# Altium PCB PCB_MB.PcbDoc
Units mm, origin at the board's own origin, x right, y up, seen from the top; angles counter-clockwise.
Board outline 150 x 150 mm, 2 copper layers (Top Layer, GND), stack 0.325 mm thick; 24 components, 29 nets, 193 pads, 0 vias.
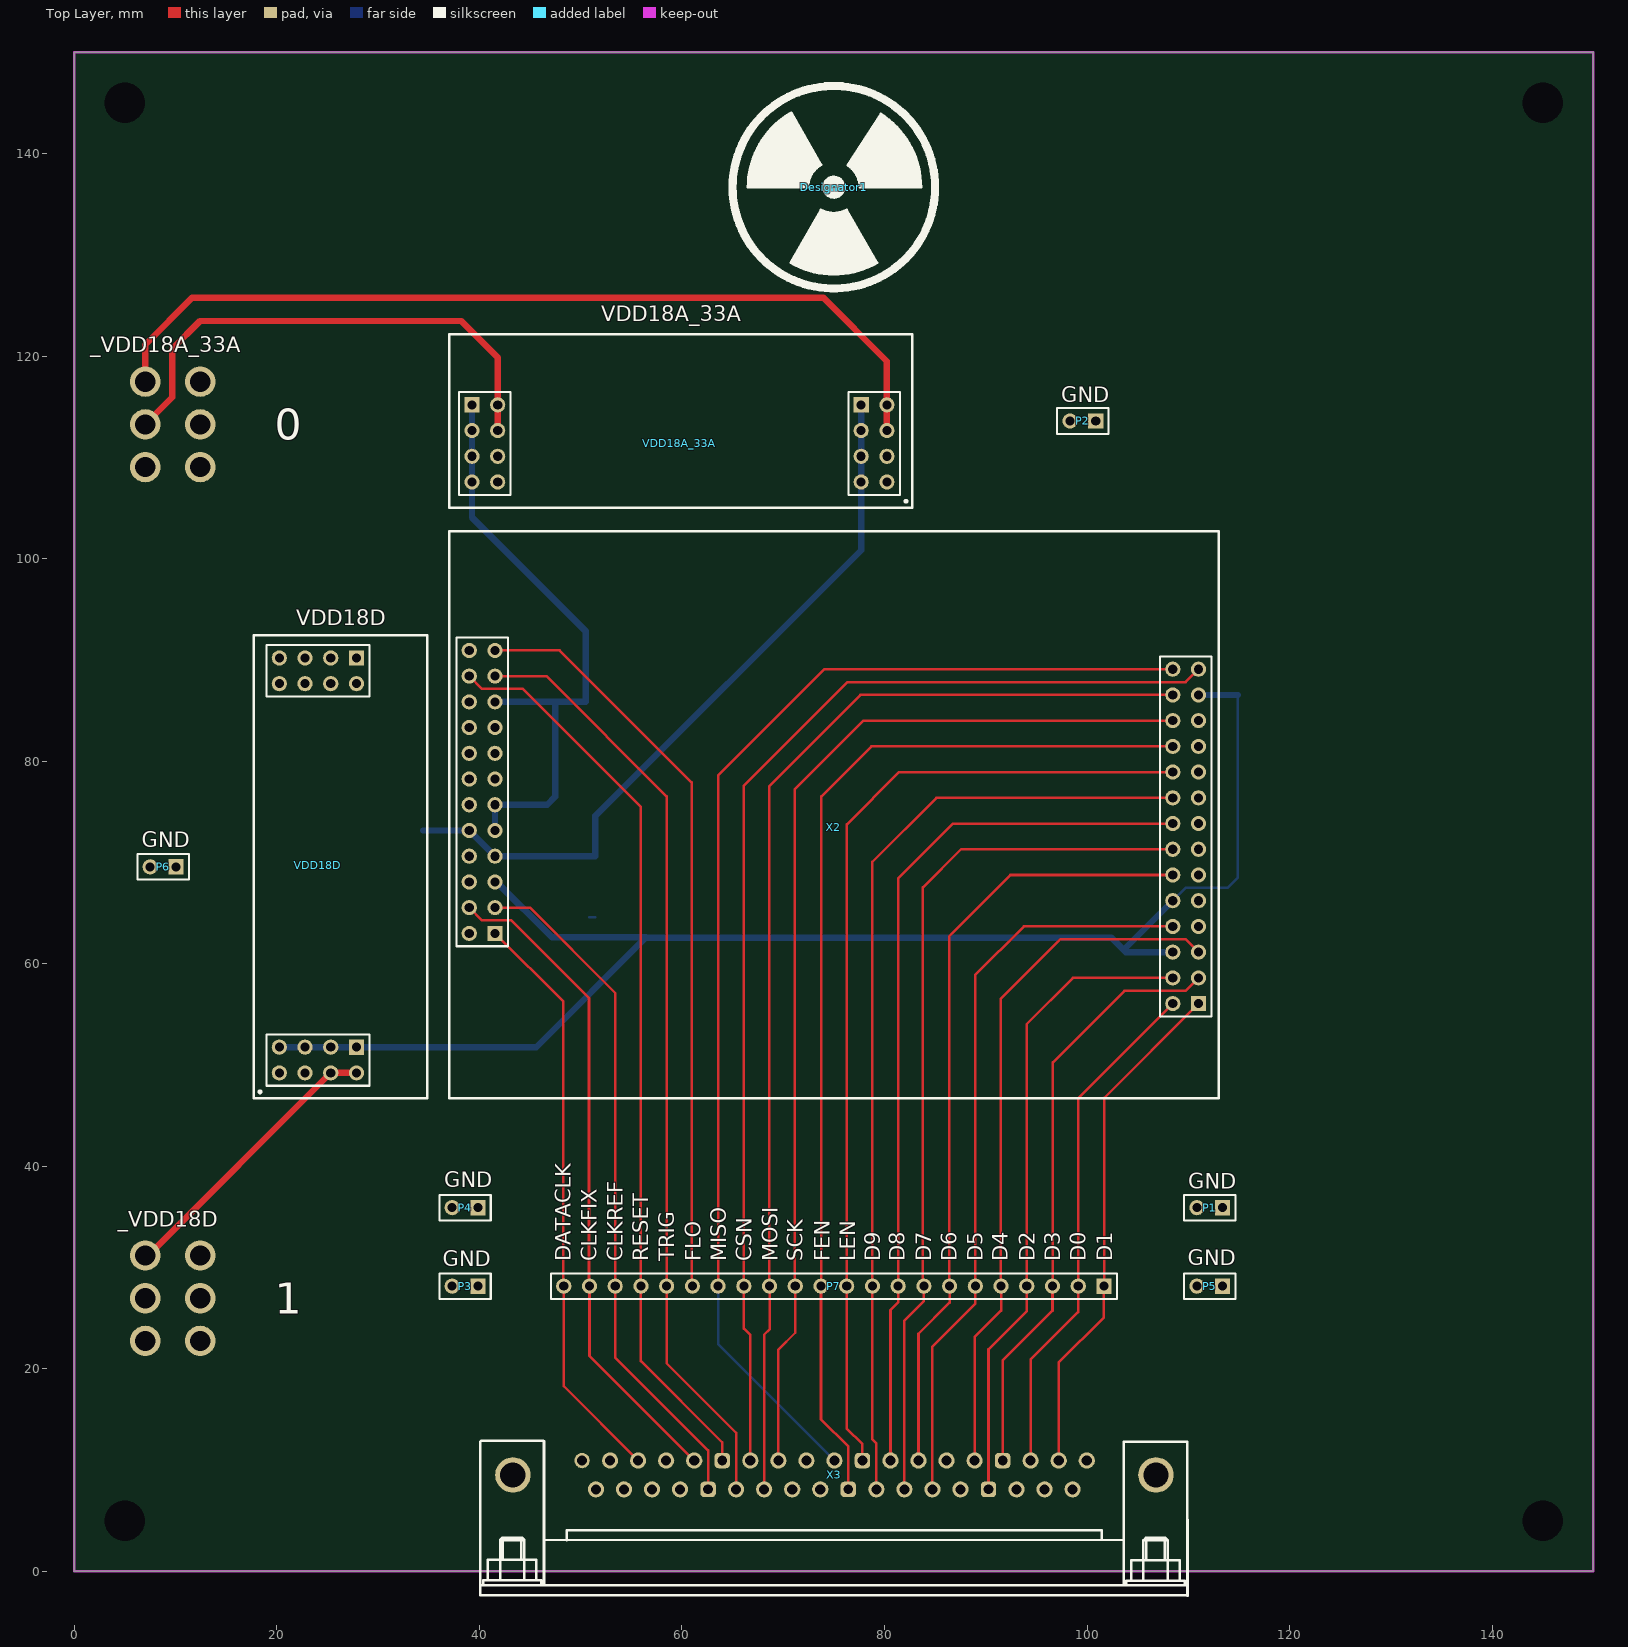
[diagram p0: Top Layer view]
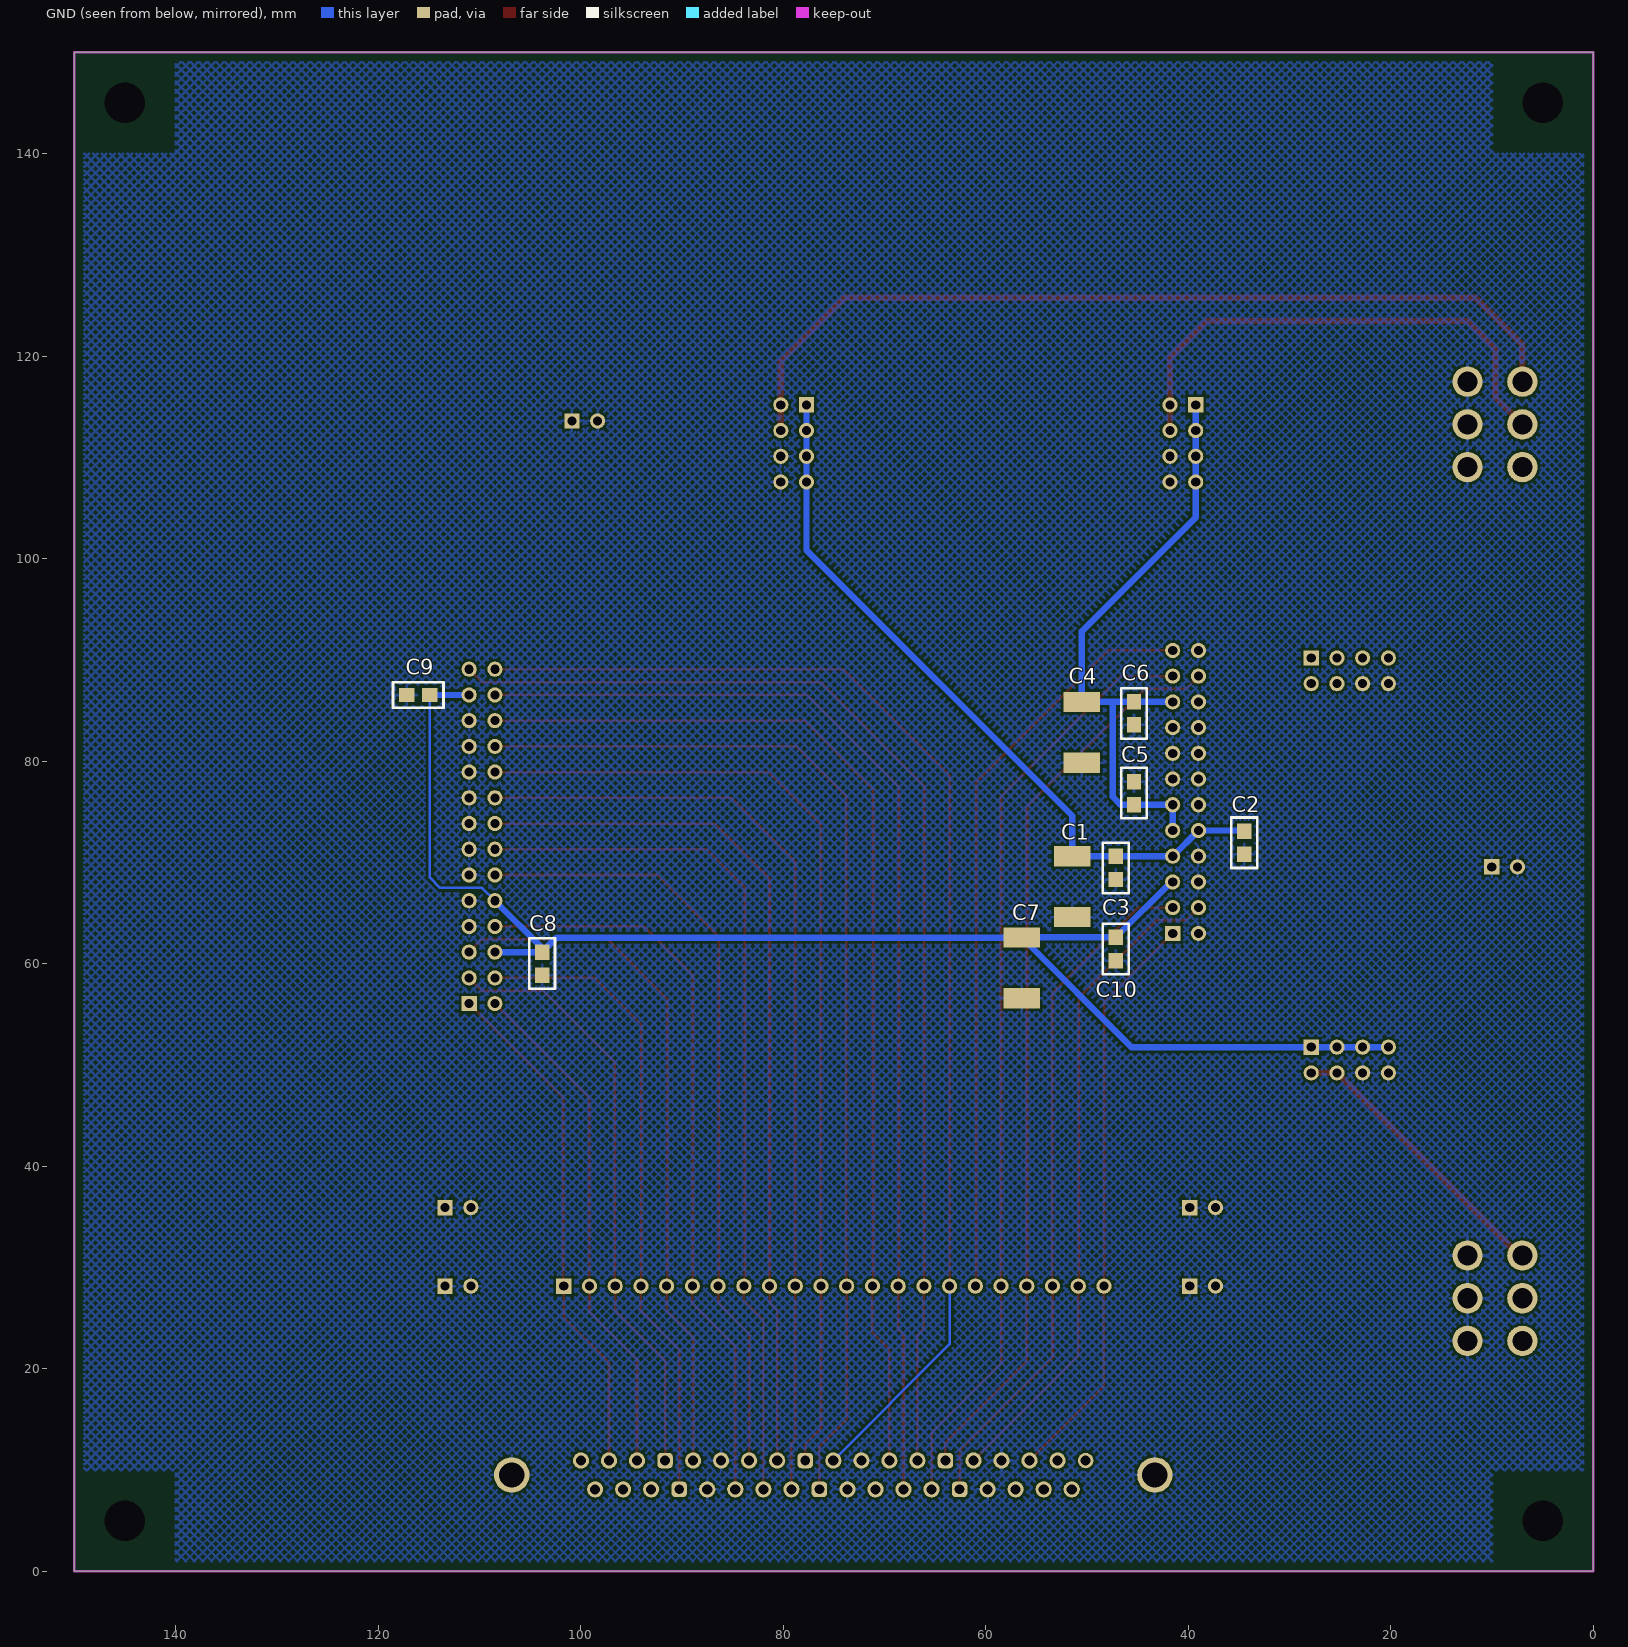
[diagram p1: GND view, seen from below]

## Layer stack, top to bottom
Top Solder: solder mask 0.0102, Solder Resist, Dk 3.5
Top Layer: signal copper 0.0356
Dielectric 1: core 0.254, FR-4, Dk 4.2
GND: signal copper 0.0356
Bottom Solder: solder mask 0.0102, Solder Resist, Dk 3.5

## Board outline
0,0 0,150 150,150 150,0

## Design rules (kind name [scope] priority, off if disabled: settings)
Clearance [All] p1: gap=0.254
PolygonConnect [All] p1: connectstyle=Relief reliefconductorwidth=0.254 reliefentries=4 polygonreliefangle="90 Angle" airgapwidth=0.254
RoutingVias [All] p1: holewidth=0.711 width=1.27 viastyle="Through Hole" minholewidth=0.711 minwidth=1.27 maxholewidth=0.711 maxwidth=1.27
SolderMaskExpansion [All] p1: expansion=0.102
Width [All] p1: maxlimit=1.254 minlimit=0.254 preferedwidth=0.254
29 further rules are at their usual default settings.

## Components (designator, comment, footprint, x,y, rotation, side; value= is the part's Value field where it differs from the comment)
_VDD18A_33A "VDD18A_33A" POWER 14.63,113.259 r90 top
_VDD18D "VDD18D" POWER 14.63,26.975 r90 top
C1 "10,0" Cap_BIG 49.555,71.704 r0 bottom
C2 "100n" CAP_SMALL 33.198,69.444 r90 bottom
C3 "100n" CAP_SMALL 45.898,66.954 r90 bottom
C4 "10,0" Cap_BIG 48.616,86.944 r0 bottom
C5 "100n" CAP_SMALL 46.634,79.35 r270 bottom
C6 "100n" CAP_SMALL 44.094,82.22 r90 bottom
C7 "10,0" Cap_BIG 54.559,63.678 r0 bottom
C8 "100n" CAP_SMALL 102.54,57.506 r90 bottom
C9 "100n" CAP_SMALL 118.542,85.268 r180 bottom
C10 "100n" CAP_SMALL 45.898,58.953 r90 bottom
Designator1 "Comment" RADIATION 75,136.677 r0 top
P1 "GND" HDR1X2 113.386,35.916 r180 top
P2 "GND" HDR1X2 100.863,113.602 r180 top
P3 "GND" HDR1X2 39.853,28.166 r180 top
P4 "GND" HDR1X2 39.853,35.916 r180 top
P5 "GND" HDR1X2 113.386,28.166 r180 top
P6 "GND" HDR1X2 10.033,69.571 r180 top
P7 "Header 22" HDR1X22 101.67,28.166 r180 top
VDD18A_33A "VDD18A_33A" MEZON_POWER_NEW 80.239,107.569 r180 top
VDD18D "VDD18D" MEZON_POWER_NEW 20.244,49.225 r90 top
X2 "EV76_MEZ" EV76C661_MEZONINE 39,63 r0 top
X3 "CHEAP_CON_37_FEMALE" CHEAP_CONN_FEMALE 106.805,9.525 r180 top

## Footprints (in the part's own frame and the unit in brackets; to place one, negate y for a bottom-side part, rotate by r counter-clockwise, add the part's x,y. Pads: shape width x height; smd on the part's side, far side on the other; paste and mask are expansions set on the pad)
Cap_BIG [mm] "FROM_MAX"
  rect 3.6x2 smd: 1(1.905,7.092) 2(1.905,1.092)
  body extent 0,-0.01 3.81,8.19, height 2.54
CAP_SMALL [mil] "FROM_MAX"
  rect 60x55.98 smd: 1(53.71,50) 2(143.71,50)
  silkscreen extent 1,0 197,100, body extent 20,18 178,82, height 100
CHEAP_CONN_FEMALE [mm] "CHEAP_CONN_FEMALE"
  round 1.6 hole 1: 1(6.833,-1.422) 2(9.601,-1.422) 3(12.37,-1.422) 5(17.907,-1.422) 6(20.676,-1.422) 7(23.444,-1.422) 8(26.213,-1.422) 10(31.75,-1.422) 11(34.519,-1.422) 12(37.287,-1.422) 13(40.056,-1.422) 15(45.593,-1.422) 16(48.362,-1.422) 17(51.13,-1.422) 18(53.899,-1.422) 20(8.23,1.422) 21(10.998,1.422) 22(13.767,1.422) 24(19.304,1.422) 25(22.073,1.422) 26(24.841,1.422) 27(27.61,1.422) 29(33.147,1.422) 30(35.916,1.422) 31(38.684,1.422) 32(41.453,1.422) 34(46.99,1.422) 35(49.759,1.422) 36(52.527,1.422) 37(55.296,1.422)
  rrect50% 1.524x1.524 hole 0.965: 4(15.138,-1.422) 9(28.981,-1.422) 14(42.824,-1.422) 23(16.535,1.422) 28(30.378,1.422) 33(44.221,1.422)
  round 1.524 hole 0.965: 19(56.667,-1.422)
  round 3.5 hole 2.5: 38(0,0) 39(63.5,0)
  silkscreen extent -3.11,-3.36 66.72,11.92
EV76C661_MEZONINE [mm]
  rect 1.5x1.5 hole 0.9: 1(2.54,0) 25(72.009,-6.934)
  round 1.5 hole 0.9: 2(0,0) 3(2.54,2.54) 4(0,2.54) 5(2.54,5.08) 6(0,5.08) 7(2.54,7.62) 8(0,7.62) 9(2.54,10.16) 10(0,10.16) 11(2.54,12.7) 12(0,12.7) 13(2.54,15.24) 14(0,15.24) 15(2.54,17.78) 16(0,17.78) 17(2.54,20.32) 18(0,20.32) 19(2.54,22.86) 20(0,22.86) 21(2.54,25.4) 22(0,25.4) 23(2.54,27.94) 24(0,27.94) 26(72.009,-4.394) 27(72.009,-1.854) 28(72.009,0.686) 29(72.009,3.226) 30(72.009,5.766) 31(72.009,8.306) 32(72.009,10.846) 33(72.009,13.386) 34(72.009,15.926) 35(72.009,18.466) 36(72.009,21.006) 37(72.009,23.546) 38(72.009,26.086) 39(69.469,-6.934) 40(69.469,-4.394) 41(69.469,-1.854) 42(69.469,0.686) 43(69.469,3.226) 44(69.469,5.766) 45(69.469,8.306) 46(69.469,10.846) 47(69.469,13.386) 48(69.469,15.926) 49(69.469,18.466) 50(69.469,21.006) 51(69.469,23.546) 52(69.469,26.086)
  silkscreen extent -1.99,-16.28 74.01,39.72
HDR1X2 [mm] "Connector; Header; 2 Position"
  rect 1.5x1.5 hole 0.9: 1(0,0)
  round 1.5 hole 0.9: 2(2.54,0)
  silkscreen extent -1.27,-1.27 3.81,1.27
HDR1X22 [mm] "Connector; Header; 22 Position"
  rect 1.5x1.5 hole 0.9: 1(0,0)
  round 1.5 hole 0.9: 2(2.54,0) 3(5.08,0) 4(7.62,0) 5(10.16,0) 6(12.7,0) 7(15.24,0) 8(17.78,0) 9(20.32,0) 10(22.86,0) 11(25.4,0) 12(27.94,0) 13(30.48,0) 14(33.02,0) 15(35.56,0) 16(38.1,0) 17(40.64,0) 18(43.18,0) 19(45.72,0) 20(48.26,0) 21(50.8,0) 22(53.34,0)
  silkscreen extent -1.27,-1.27 54.61,1.27
MEZON_POWER_NEW [mm]
  round 1.5 hole 0.9: 1(0,0) 1(0,-2.54) 2(0,-5.08) 2(0,-7.62) 3(2.54,0) 3(2.54,-2.54) 3(2.54,-5.08) 4(38.43,-2.54) 4(38.43,0) 5(38.43,-7.62) 5(38.43,-5.08) 6(40.97,0) 6(40.97,-5.08) 6(40.97,-2.54)
  rect 1.5x1.5 hole 0.9: 3(2.54,-7.62) 6(40.97,-7.62)
  silkscreen extent -2.51,-14.6 43.21,2.54
POWER [mm] "POWER"
  round 3 hole 2: 1(4.217,7.62) 2(0,7.62) 3(-4.217,7.62) 4(4.217,2.198) 5(0,2.198) 6(-4.217,2.198)
RADIATION [mm]
  silkscreen extent -10,-10 10,10

## Part data
_VDD18A_33A _VDD18D: library part POWER
C1 C4 C7: library part CAP_BIG
C2 C3 C5 C6 C8 C9 C10: library part CAP_SMALL
P1 P2 P3 P4 P5 P6: library part "Header 2", "Header, 2-Pin"
P7: "Header, 22-Pin"
VDD18A_33A VDD18D: library part MEZON_POWER_NEW
X2: library part EV76C661_MEZ

## Free pads (board coordinates)
  round 3 hole 4 unplated: 0(5,5) 0(5,145) 0(145,5) 0(145,145)

## Nets (pads, with @x,y where several pads share a name; then routed paths per layer and width w, separated by ;. In a path a pad name is that pad's centre, name@x,y a point inside that pad or via, vN(x,y) a via of type N, cw(c..) or ccw(c..) an arc to the next point about the centre after c; other vN are vias at no path point)
6V_18A: _VDD18A_33A.1 VDD18A_33A.2 | length 88.3
  Top Layer w0.635: _VDD18A_33A.1 7.01,121.133 11.659,125.781 73.939,125.781 80.239,119.482 80.239,115.189 VDD18A_33A.2@80.239,112.649
6V_18D: _VDD18D.1 VDD18D.2 | length 28.3
  Top Layer w0.635: _VDD18D.1 7.291,31.192 25.324,49.225 VDD18D.2@27.864,49.225
6V_33A: _VDD18A_33A.2 VDD18A_33A.5 | length 50.5
  Top Layer w0.635: _VDD18A_33A.2 9.677,115.926 9.677,120.726 12.421,123.469 38.202,123.469 41.808,119.863 41.808,115.189 VDD18A_33A.5@41.808,112.649
CLKFIX: P7.21 X2.4 X3.15 | length 65.5
  Top Layer w0.254: X2.4 40.253,64.287 43.155,64.287 50.825,56.617 P7.21@50.825,28.176 ; P7.21 50.87,21.29 X3.15
CLKREF: P7.20 X2.3 X3.33 | length 68.1
  Top Layer w0.254: X2.3 44.975,65.54 53.416,57.099 P7.20@53.416,28.227 ; P7.20 53.41,21.114 62.584,11.94 X3.33
CSN: P7.15 X2.38 X3.13 | length 116.5
  Top Layer w0.254: P7.15@66.091,28.202 66.091,77.572 76.327,87.808 109.731,87.808 X2.38 ; P7.15 66.11,23.984 66.75,23.344 X3.13
D0: P7.2 X2.39 X3.3 | length 50.9
  Top Layer w0.254: X3.3 94.436,20.903 99.13,25.597 P7.2 ; P7.2@99.136,28.227 99.136,46.733 X2.39
D1: P7.1 X2.25 X3.2 | length 50.7
  Top Layer w0.254: X3.2 97.204,20.623 101.67,25.089 P7.1 ; P7.1@101.702,28.253 101.702,46.758 X2.25
D2: P7.4 X2.40 X3.23 | length 63.8
  Top Layer w0.254: X3.23 90.27,21.919 94.05,25.699 P7.4 ; P7.4@94.031,28.202 94.031,54.026 98.611,58.606 X2.40
D3: P7.3 X2.26 X3.4 | length 59.1
  Top Layer w0.254: X3.4 91.667,20.826 96.59,25.749 P7.3 ; P7.3@96.622,28.253 96.622,50.267 103.683,57.328 109.731,57.328 X2.26
D4: P7.5 X2.27 X3.5 | length 69.2
  Top Layer w0.254: X3.5 88.898,23.138 91.51,25.749 P7.5 ; P7.5@91.465,28.176 91.465,56.54 97.358,62.433 109.722,62.433 X2.27
D5: P7.6 X2.42 X3.25 | length 74
  Top Layer w0.254: X3.25 84.733,22.198 88.97,26.435 P7.6 ; P7.6@88.951,28.202 88.951,58.877 93.759,63.686 X2.42
D6: P7.7 X2.44 X3.7 | length 77.6
  Top Layer w0.254: X3.7 83.361,23.468 86.43,26.537 P7.7 ; P7.7@86.385,28.176 86.385,62.713 92.439,68.766 X2.44
D7: P7.8 X2.45 X3.26 | length 86.4
  Top Layer w0.254: X3.26 81.964,24.763 83.89,26.689 P7.8 ; P7.8@83.795,28.206 83.795,67.539 87.562,71.306 X2.45
D8: P7.9 X2.46 X3.8 | length 87.1
  Top Layer w0.254: X3.8 80.593,25.805 81.35,26.562 P7.9 ; P7.9@81.356,28.227 81.356,68.428 86.774,73.846 X2.46
D9: P7.10 X2.47 X3.27 | length 94.4
  Top Layer w0.254: P7.10@78.791,28.202 78.791,70.053 85.123,76.386 X2.47 ; P7.10 78.81,13.036 79.196,12.651 X3.27
DATACLK: P7.22 X2.1 X3.17 | length 57.9
  Top Layer w0.254: X2.1 48.285,56.255 P7.22@48.285,28.176 ; P7.22 48.33,18.293 X3.17
FEN: P7.12 X2.49 X3.28 | length 106.2
  Top Layer w0.254: P7.12 73.73,15.018 76.427,12.321 X3.28 ; P7.12@73.762,28.253 73.762,76.53 78.697,81.466 X2.49
FLO: P7.17 X2.23 | length 74.5
  Top Layer w0.254: X2.23 47.922,90.94 60.96,77.902 P7.17@60.96,28.18
GND: _VDD18A_33A.4 _VDD18A_33A.5 _VDD18A_33A.6 _VDD18D.4 _VDD18D.5 _VDD18D.6 C1.1 C2.1 C3.1 C4.1 C5.1 C6.1 C7.1 C8.1 C9.1 C10.1 P1.1 P1.2 P2.1 P2.2 P3.1 P3.2 P4.1 P4.2 P5.1 P5.2 P6.1 P6.2 VDD18A_33A.1 VDD18A_33A.4 VDD18D.1 VDD18D.4 X2.2 X2.6 X2.8 X2.12 X2.13 X2.14 X2.15 X2.16 X2.17 X2.18 X2.20 X2.24 X2.28 X2.29 X2.30 X2.31 X2.32 X2.33 X2.34 X2.35 X2.36 X3.6 X3.11 X3.16 X3.24 X3.29 X3.34 X3.38 X3.39 | length 0.6
  GND w0.254: C1.1@50.874,64.612 C1.1
LEN: P7.11 X2.48 X3.9 | length 97.7
  Top Layer w0.254: P7.11 76.27,14.129 77.824,12.575 X3.9 ; P7.11@76.276,28.227 76.276,73.762 81.44,78.926 X2.48
MISO: P7.16 X2.52 X3.10 | length 121.6
  Top Layer w0.254: P7.16@63.576,28.227 63.576,78.588 74.074,89.086 X2.52
  GND w0.254: P7.16 63.57,22.433 X3.10
MOSI: P7.14 X2.51 X3.31 | length 113.2
  Top Layer w0.254: X3.31 68.121,23.366 68.65,23.895 P7.14 ; P7.14@68.605,28.176 68.605,77.521 77.63,86.546 X2.51
RESET: P7.19 X2.22 X3.14 | length 90.1
  Top Layer w0.254: X2.22 40.253,87.147 44.298,87.147 55.931,75.514 P7.19@55.931,28.202 ; P7.19 55.95,20.758 63.981,12.727 X3.14
SCK: P7.13 X2.50 X3.12 | length 107.1
  Top Layer w0.254: X3.12 69.518,21.893 71.19,23.565 P7.13 ; P7.13@71.12,28.18 71.12,77.216 77.91,84.006 X2.50
TRIG: P7.18 X2.21 X3.32 | length 93.1
  Top Layer w0.254: X2.21 46.626,88.4 58.496,76.53 P7.18@58.496,28.227 ; P7.18 58.49,20.555 65.353,13.692 X3.32
VDD18A: C1.2 C2.2 C3.2 VDD18A_33A.3 X2.7 X2.10 | length 73.5
  GND w0.635: C2.2@34.468,73.16 X2.10 X2.7 ; X2.7@41.548,70.612 C1.2 51.46,74.6 77.699,100.838 77.699,107.569 77.699,110.109 77.699,112.649 VDD18A_33A.3@77.699,115.189
VDD18D: C7.2 C8.2 C9.2 C10.2 VDD18D.3 X2.5 X2.37 X2.41 X2.43 | length 146.8
  GND w0.254: X2.43 109.731,67.488 113.868,67.488 114.892,68.511 C9.2
  GND w0.635: VDD18D.3@20.244,51.765 22.784,51.765 25.324,51.765 27.864,51.765 45.608,51.765 C7.2@56.446,62.604 ; X2.5 41.691,68.08 C10.2 C7.2@56.446,62.604 ; X2.41 103.82,61.146 C8.2 ; X2.43 103.81,61.567 C8.2 ; X2.37 111.017,86.538 C9.2 ; C7.2@56.446,62.604 C7.2 102.38,62.586 C8.2
VDD33A: C4.2 C5.2 C6.2 VDD18A_33A.6 X2.9 X2.11 X2.19 | length 61.2
  GND w0.635: VDD18A_33A.6@39.268,115.189 39.268,112.649 39.268,110.109 39.268,107.569 39.268,104.064 50.521,92.812 C4.2 47.473,85.852 ; X2.9 X2.11 C5.2 46.693,75.699 47.473,76.479 47.473,85.852 ; X2.19 41.548,85.852 47.473,85.852
pads on no net: _VDD18A_33A.3 _VDD18D.2 _VDD18D.3 VDD18D.5 VDD18D.6 X3.1 X3.18 X3.19 X3.20 X3.21 X3.22 X3.30 X3.35 X3.36 X3.37

## Polygon pours and split planes (outlines as drawn)
GND on GND "Top Layer-No Net" (hatched 45Degree grid 0.6 track 0.25, remove dead copper, pour order 7): 1,1 1,149 149,149 149,1

## Keep-outs
Keep-Out Layer:
  the board outline again, w0.254

## Other copper
GND:
  pour cut-out: 0,140 10,140 10,150 0,150
  pour cut-out: 140,140 150,140 150,150 140,150
  pour cut-out: 140,0 150,0 150,10 140,10
  pour cut-out: 0,0 10,0 10,10 0,10

## Silkscreen, mask and mechanical layers (free items; w line width, h text height)
Top Overlay:
  text "0" at 19.787,111.735 h3.05
  text "DATACLK" at 49.022,30.632 h1.52 r90
  text "CLKFIX" at 51.613,30.632 h1.52 r90
  text "CLKREF" at 54.153,30.632 h1.52 r90
  text "RESET" at 56.693,30.632 h1.52 r90
  text "TRIG" at 59.233,30.632 h1.52 r90
  text "FLO" at 61.849,30.632 h1.52 r90
  text "MISO" at 64.364,30.632 h1.52 r90
  text "CSN" at 66.878,30.632 h1.52 r90
  text "MOSI" at 69.444,30.632 h1.52 r90
  text "SCK" at 71.933,30.632 h1.52 r90
  text "FEN" at 74.574,30.632 h1.52 r90
  text "LEN" at 77.089,30.632 h1.52 r90
  text "D9" at 79.604,30.632 h1.52 r90
  text "D8" at 82.017,30.632 h1.52 r90
  text "D7" at 84.633,30.632 h1.52 r90
  text "D6" at 87.122,30.632 h1.52 r90
  text "D5" at 89.687,30.632 h1.52 r90
  text "D4" at 92.177,30.632 h1.52 r90
  text "D2" at 94.844,30.632 h1.52 r90
  text "D3" at 97.333,30.632 h1.52 r90
  text "D0" at 99.873,30.632 h1.52 r90
  text "D1" at 102.489,30.632 h1.52 r90
  text "1" at 19.787,25.451 h3.05